# Altium PCB F407ULPI&externalDAC.PcbDoc
Units mm, origin at the board's own origin, x right, y up, seen from the top; angles counter-clockwise.
Board outline 152.4 x 101.6 mm, 4 copper layers (Top Layer, source, splane, Bottom Layer), stack 0.778 mm thick; 53 components, 99 nets, 320 pads, 89 vias.
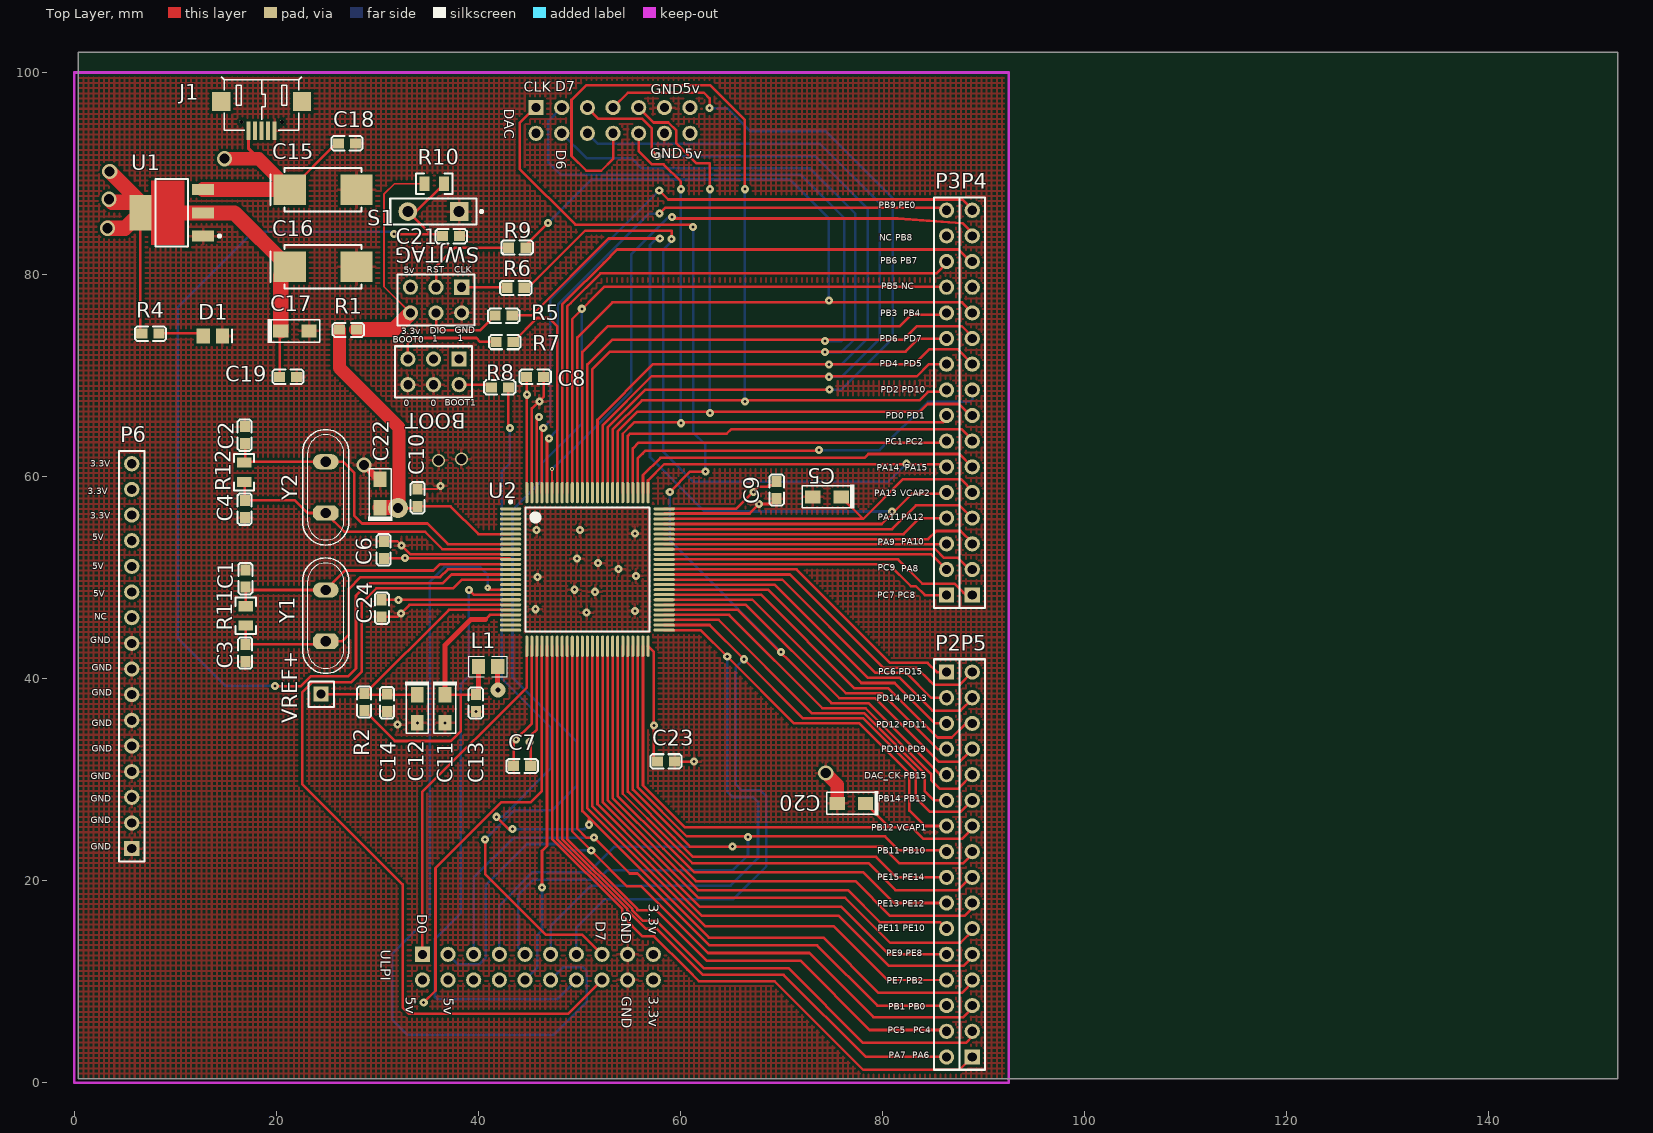
[diagram p0: Top Layer view]
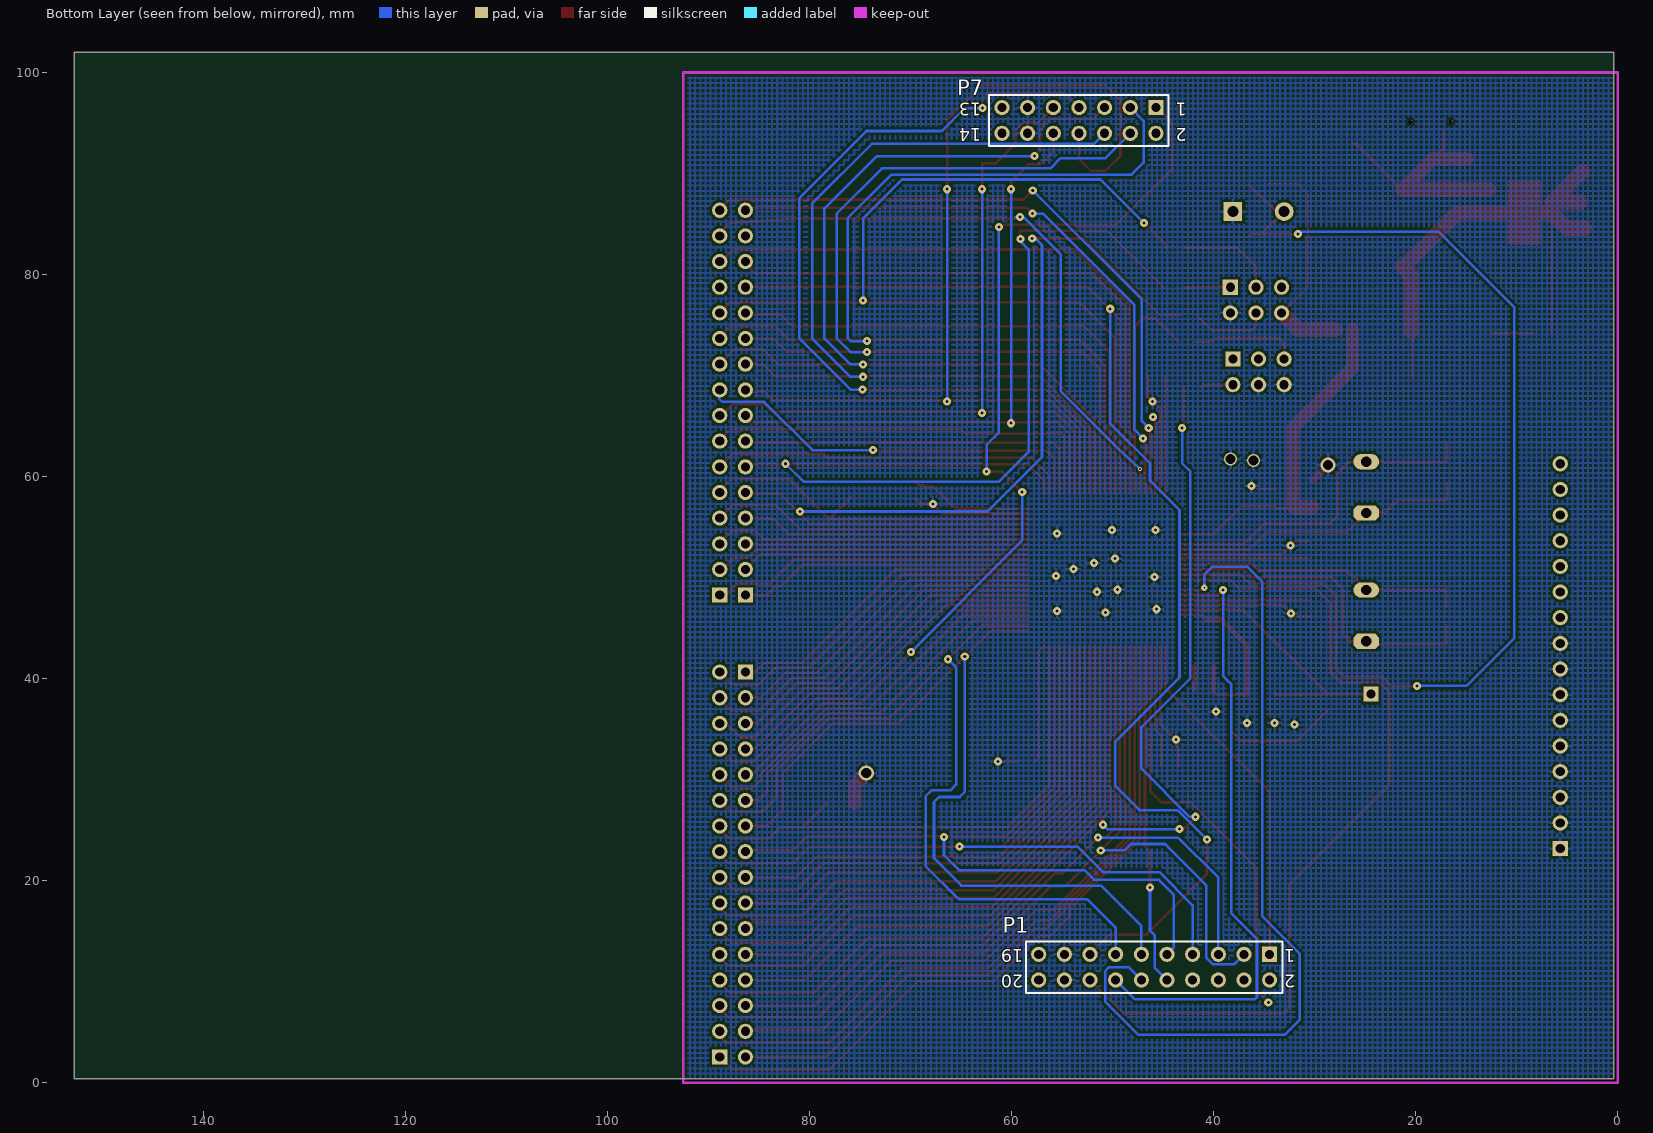
[diagram p1: Bottom Layer view, seen from below]
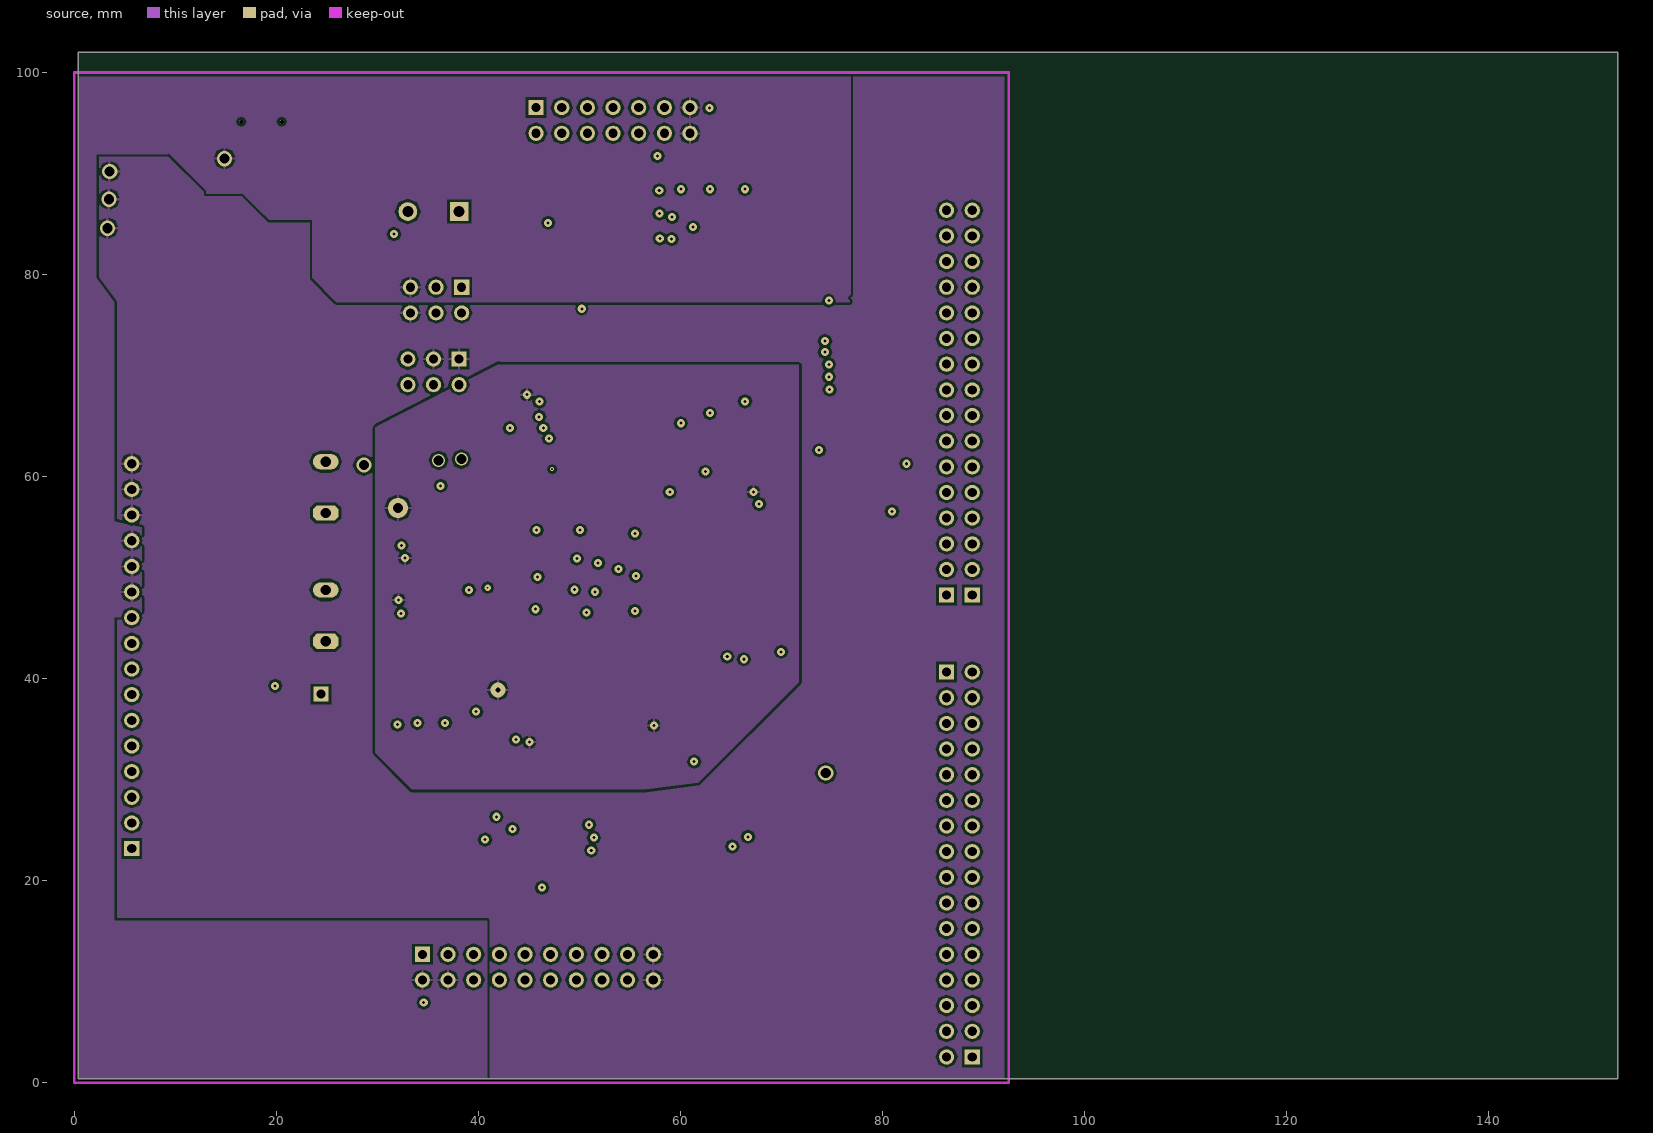
[diagram p2: source]
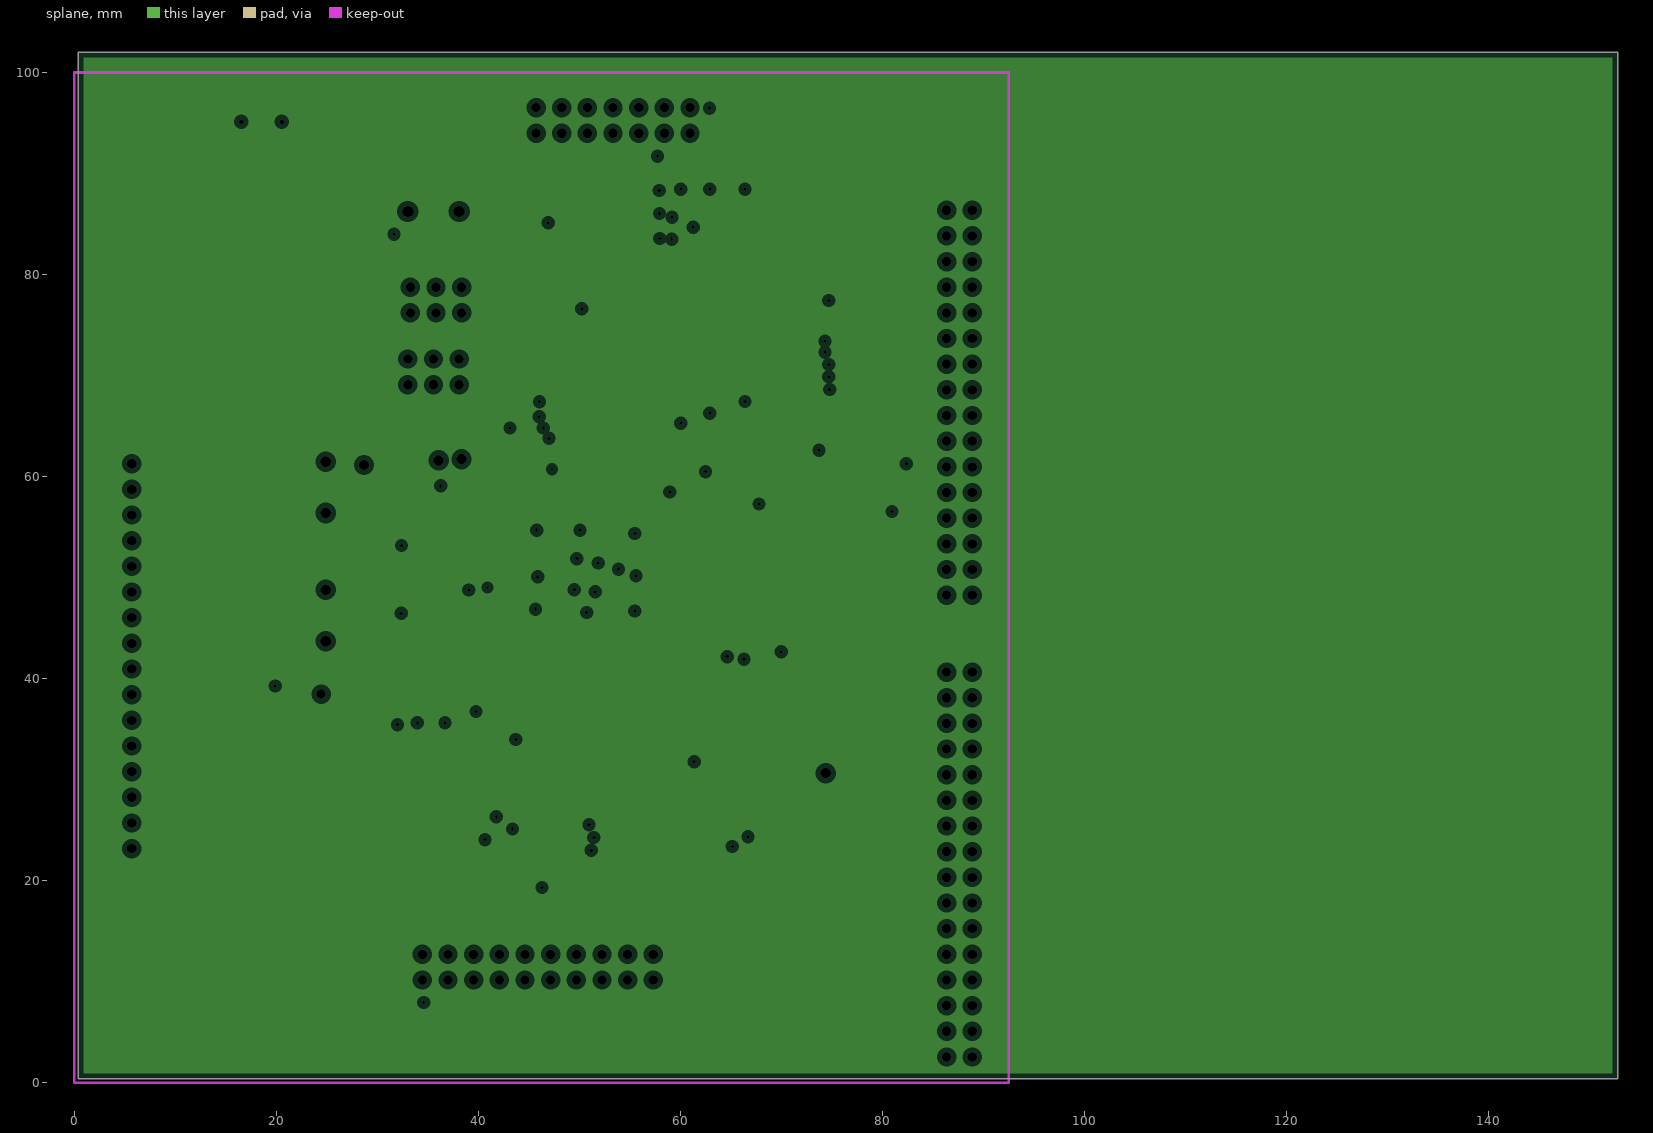
[diagram p3: splane, clearances drawn from the general rule]

## Layer stack, top to bottom
Top Solder: solder mask 0.0102, Solder Resist, Dk 3.5
Top Layer: signal copper 0.0356
Dielectric 1: core 0.254, FR-4, Dk 4.2
source: signal copper 0.036
Dielectric 3: prepreg 0.127, Dk 4.2
splane: plane copper 0.036
Dielectric 2: core 0.254, Dk 4.2
Bottom Layer: signal copper 0.0356
Bottom Solder: solder mask 0.0102, Solder Resist, Dk 3.5

## Board outline
0.4,0.4 152.8,0.4 152.8,102 0.4,102

## Design rules (kind name [scope] priority, off if disabled: settings)
Clearance polyClearance [InPolygon] p1: gap=0.254
ComponentClearance [All] p1 off: gap=0.254 collisioncheckmode=3 verticalgap=0.254 showdistances=FALSE
HoleSize [All] p1 off: absolutevalues=TRUE maxlimit=2.54 minlimit=0.025 maxpercent=80.000 minpercent=20.000
HoleToHoleClearance [All] p1 off: gap=0.254 allowstackedmicrovias=TRUE
MinimumSolderMaskSliver [All] p1 off: minsoldermaskwidth=0.254
PasteMaskExpansion [All] p1 off: expansion=0
PlaneClearance [All] p1: clearance=0.508
PlaneConnect [All] p1: planeconnectstyle=Relief reliefexpansion=0.508 reliefentries=4 reliefconductorwidth=0.254 reliefairgap=0.254
PolygonConnect [All] p1: connectstyle=Relief reliefconductorwidth=0.254 reliefentries=4 polygonreliefangle="90 Angle" airgapwidth=0.254
RoutingVias [All] p1: holewidth=0.3 width=0.8 viastyle="Through Hole" minholewidth=0.3 minwidth=0.8 maxholewidth=1 maxwidth=2
SilkToSilkClearance [All] p1 off: silktosilkclearance=0.254
SilkToSolderMaskClearance [IsPad] p1 off: minsilkscreentomaskgap=0.254 clearancetoexposedcopper=TRUE
SolderMaskExpansion [All] p1 off: expansion=0.102
Width [All] p1: maxlimit=2.54 minlimit=0.178 preferedwidth=0.254
21 further rules are at their usual default settings.

## Components (designator, comment, footprint, x,y, rotation, side; value= is the part's Value field where it differs from the comment)
BOOT "BOOT select" HDR2X3_CEN 38.1,71.628 r180 top (schematic designator "BOOT select")
C1 "cap smd" CAP-0603 16.967,49.047 r90 top
C2 "cap smd" CAP-0603 16.891,63.246 r90 top
C3 "cap smd" CAP-0603 16.942,41.681 r90 top
C4 "cap smd" CAP-0603 16.891,55.931 r90 top
C5 "Cap" CAP-3216 74.524,57.988 r180 top
C6 "cap smd" CAP-0603 30.658,51.892 r90 top
C7 "cap smd" CAP-0603 45.187,31.369 r180 top
C8 "cap smd" CAP-0603 44.78,69.85 r0 top
C9 "cap smd" CAP-0603 69.52,59.512 r270 top
C10 "cap smd" CAP-0603 33.96,58.75 r270 top
C11 "Cap Pol" CAP-3216 36.703,37.008 r270 top
C12 "Cap Pol" CAP-3216 33.96,37.008 r270 top
C13 "Cap" CAP-0603 39.776,36.728 r90 top
C14 "Cap" CAP-0603 30.988,36.754 r90 top
C15 "Cap" CAP-7343 24.638,88.392 r0 top
C16 "Cap" CAP-7343 24.638,80.772 r0 top
C17 "Cap" CAP-3216 21.844,74.422 r0 top
C18 "cap smd" CAP-0603 26.162,92.964 r0 top
C19 "cap smd" CAP-0603 20.32,69.85 r0 top
C20 "Cap" CAP-3216 76.937,27.635 r180 top
C21 "Cap" CAP-0603 38.151,83.82 r180 top
C22 "Cap" CAP-3216 30.277,58.318 r90 top
C23 "cap smd" CAP-0603 57.734,31.775 r0 top
C24 "cap smd" CAP-0603 30.429,47.803 r270 top
D1 "LED2" LED_0805 13.716,73.914 r0 top
J1 "USB" microUSB 18.542,94.234 r270 top
L1 "Inductor" 0805-1 40.97,41.199 r180 top
P1 "ULPI PHY" HDR2X10 34.46,12.7 r0 bottom
P2 "GPIO_PA" HDR1X16 86.36,40.64 r270 top
P3 "GPIO_PB" HDR1X16 86.36,48.26 r90 top
P4 "GPIO_PC" HDR1X16 88.9,48.26 r90 top
P5 "GPIO_PD" HDR1X16 88.9,2.54 r90 top
P6 "GPIO_PE" HDR1X16 5.69,23.165 r90 top
P7 "externalDAC" HDR2X7 45.72,96.52 r0 bottom
R1 "RES1" CAP-0603 27.965,74.549 r180 top
R2 "Res1" CAP-0603 28.727,36.83 r90 top
R4 "RES1" CAP-0603 8.382,74.168 r180 top
R5 "RES1" CAP-0603 43.358,75.946 r180 top
R6 "RES1" CAP-0603 44.552,78.689 r180 top
R7 "RES1" CAP-0603 43.459,73.33 r180 top
R8 "RES1" CAP-0603 41.275,68.809 r0 top
R9 "RES1" CAP-0603 43.002,82.652 r0 top
R10 "RES1" R2012[0805] 35.636,88.976 r180 top
R11 "RES1" R2012[0805] 16.967,46.203 r90 top
R12 "RES1" R2012[0805] 16.815,60.427 r90 top
S1 "SW-PB" SPST-2 35.56,86.233 r180 top
SWJTAG "SWJTAG" HDR2X3_CEN 38.354,78.74 r180 top
U1 "1117-3.3" SOT223 9.652,86.106 r90 top
U2 "STM32F407V" LQFP-100_M 50.8,50.8 r0 top
VREF+ "VREF+" HDR1*1 24.435,38.456 r180 top
Y1 "8MHz" Crystal 24.892,46.228 r90 top
Y2 "32.768kHz" Crystal 24.892,58.928 r90 top

## Footprints (in the part's own frame and the unit in brackets; to place one, negate y for a bottom-side part, rotate by r counter-clockwise, add the part's x,y. Pads: shape width x height; smd on the part's side, far side on the other; paste and mask are expansions set on the pad)
0805-1 [mm] "贴片带丝印"
  rect 1.3x1.5 smd: 1(-0.95,0) 2(0.95,0)
  silkscreen extent -1.91,-1.02 1.91,1.02, body extent -1.14,-0.51 1.14,0.51, height 1
CAP-0603 [mm]
  rect 1.1x1 smd: 1(0,0) 2(1.7,0)
  silkscreen extent -0.71,-0.67 2.39,0.73
CAP-3216 [mil] "钽电容"
  rect 60x50 smd: 1(-55,0) 2(55,0)
  silkscreen extent -106,-48 96,46
CAP-7343 [mm] "钽电容"
  rect 3.2x3.05 smd: 1(-3.302,0) 2(3.302,0)
  silkscreen extent -5.21,-2.16 3.81,2.16, body extent -3.68,-1.91 3.68,1.91, height 2.95
Crystal [mil]
  oct 60x100 hole 40: 1(-100,0)
  oval 60x100 hole 40: 2(100,0)
  silkscreen extent -225,-90 225,90, body extent -224,-91 224,89, height 134
HDR1*1 [mm]
  rect 1.5x1.5 hole 0.9: 1(0,0)
  silkscreen extent -1.27,-1.27 1.27,1.27
HDR1X16 [mm] "Connector; Header; 16 Position"
  rect 1.5x1.5 hole 0.9: 1(0,0)
  round 1.5 hole 0.9: 2(2.54,0) 3(5.08,0) 4(7.62,0) 5(10.16,0) 6(12.7,0) 7(15.24,0) 8(17.78,0) 9(20.32,0) 10(22.86,0) 11(25.4,0) 12(27.94,0) 13(30.48,0) 14(33.02,0) 15(35.56,0) 16(38.1,0)
  silkscreen extent -1.27,-1.27 39.37,1.27
HDR2X3_CEN [mm] "Connector; Header; 3x2 Position"
  rect 1.5x1.5 hole 0.9: 1(0,0)
  round 1.5 hole 0.9: 2(2.54,0) 3(5.08,0) 4(0,2.54) 5(2.54,2.54) 6(5.08,2.54)
  silkscreen extent -1.27,-1.27 6.35,3.81
HDR2X7 [mm] "Connector; Header; 7x2 Position"
  rect 1.5x1.5 hole 0.9: 1(0,0)
  round 1.5 hole 0.9: 2(0,2.54) 3(2.54,0) 4(2.54,2.54) 5(5.08,0) 6(5.08,2.54) 7(7.62,0) 8(7.62,2.54) 9(10.16,0) 10(10.16,2.54) 11(12.7,0) 12(12.7,2.54) 13(15.24,0) 14(15.24,2.54)
  silkscreen extent -1.27,-1.27 16.51,3.81
HDR2X10 [mm] "Connector; Header; 10x2 Position"
  rect 1.5x1.5 hole 0.9: 1(0,0)
  round 1.5 hole 0.9: 2(0,2.54) 3(2.54,0) 4(2.54,2.54) 5(5.08,0) 6(5.08,2.54) 7(7.62,0) 8(7.62,2.54) 9(10.16,0) 10(10.16,2.54) 11(12.7,0) 12(12.7,2.54) 13(15.24,0) 14(15.24,2.54) 15(17.78,0) 16(17.78,2.54) 17(20.32,0) 18(20.32,2.54) 19(22.86,0) 20(22.86,2.54)
  silkscreen extent -1.27,-1.27 24.13,3.81
LED_0805 [mm] "贴片二极管"
  rect 1.3x1.5 smd: 1(-0.95,0) 2(0.95,0)
  silkscreen extent 1.91,-0.64 1.91,0.64
LQFP-100_M [mm] "Thin QFP, 100"
  oval 2.1x0.3 smd: 1(-7.6,6) 2(-7.6,5.5) 3(-7.6,5) 4(-7.6,4.5) 5(-7.6,4) 6(-7.6,3.5) 7(-7.6,3) 8(-7.6,2.5) 9(-7.6,2) 10(-7.6,1.5) 11(-7.6,1) 12(-7.6,0.5) 13(-7.6,0) 14(-7.6,-0.5) 15(-7.6,-1) 16(-7.6,-1.5) 17(-7.6,-2) 18(-7.6,-2.5) 19(-7.6,-3) 20(-7.6,-3.5) 21(-7.6,-4) 22(-7.6,-4.5) 23(-7.6,-5) 24(-7.6,-5.5) 25(-7.6,-6) 51(7.6,-6) 52(7.6,-5.5) 53(7.6,-5) 54(7.6,-4.5) 55(7.6,-4) 56(7.6,-3.5) 57(7.6,-3) 58(7.6,-2.5) 59(7.6,-2) 60(7.6,-1.5) 61(7.6,-1) 62(7.6,-0.5) 63(7.6,0) 64(7.6,0.5) 65(7.6,1) 66(7.6,1.5) 67(7.6,2) 68(7.6,2.5) 69(7.6,3) 70(7.6,3.5) 71(7.6,4) 72(7.6,4.5) 73(7.6,5) 74(7.6,5.5) 75(7.6,6)
  oval 0.3x2.1 smd: 26(-6,-7.6) 27(-5.5,-7.6) 28(-5,-7.6) 29(-4.5,-7.6) 30(-4,-7.6) 31(-3.5,-7.6) 32(-3,-7.6) 33(-2.5,-7.6) 34(-2,-7.6) 35(-1.5,-7.6) 36(-1,-7.6) 37(-0.5,-7.6) 38(0,-7.6) 39(0.5,-7.6) 40(1,-7.6) 41(1.5,-7.6) 42(2,-7.6) 43(2.5,-7.6) 44(3,-7.6) 45(3.5,-7.6) 46(4,-7.6) 47(4.5,-7.6) 48(5,-7.6) 49(5.5,-7.6) 50(6,-7.6) 76(6,7.6) 77(5.5,7.6) 78(5,7.6) 79(4.5,7.6) 80(4,7.6) 81(3.5,7.6) 82(3,7.6) 83(2.5,7.6) 84(2,7.6) 85(1.5,7.6) 86(1,7.6) 87(0.5,7.6) 88(0,7.6) 89(-0.5,7.6) 90(-1,7.6) 91(-1.5,7.6) 92(-2,7.6) 93(-2.5,7.6) 94(-3,7.6) 95(-3.5,7.6) 96(-4,7.6) 97(-4.5,7.6) 98(-5,7.6) 99(-5.5,7.6) 100(-6,7.6)
  silkscreen extent -7.72,-6.15 6.15,6.82, body extent -7,-7 7,7, height 0.8
microUSB [mm]
  rect 1.9x1.8 smd: 0(-2.9,4) 0(-2.9,-4)
  rect 1.8x0.4 smd: 1(0,-1.3) 2(0,-0.65) 3(0,0) 4(0,0.65) 5(0,1.3)
  round 0.4 hole 0.4 unplated mask+0: ""(-0.875,2) ""(-0.875,-2)
  silkscreen extent -5.35,-4 -0.05,4, body extent -5.5,-4 0,4, height 2.5
R2012[0805] [mm]
  rect 1x1.45 smd: 1(-0.95,0) 2(0.95,0)
  silkscreen extent -1.8,-1 1.8,1, body extent -1,-0.63 1,0.63, height 0.55
SOT223 [mm] "SOT-223/SC-73; 4 Leads; Body 6.7 x 7.3 mm, inc. leads (LxW max)"
  rect 1.1x2.15 smd: 1(-2.3,-3.1) 2(0,-3.1) 3(2.3,-3.1)
  rect 3.5x2.15 smd: 4(0,3.1)
  silkscreen extent -3.35,-4.85 3.35,1.63
SPST-2 [mm] "Switch; 2 Leads"
  rect 1.85x1.85 hole 1.1: 1(-2.54,0)
  round 1.85 hole 1.1: 2(2.54,0)
  silkscreen extent -4.89,-1.27 4.28,1.27

## Part data
BOOT SWJTAG: library part "Header 3X2", "Header, 3-Pin, Dual row"
C1 C2 C3 C4 C6 C7 C8 C9 C10 C18 C19 C23 C24: library part CAP, "贴片无极性电容"
C5 C15 C16 C17 C20 C22: library part "Cap Pol S", "贴片极性电容"
C11 C12: "极性电解电容"
C13 C14 C21: "无极性电容"
D1: "Typical RED, GREEN, YELLOW, AMBER GaAs LED"
J1: library part Micro_USB, "USB 2.0, Right Angle, SMT, B Type, Receptacle, 5 Position, Black"
L1: "电感"
P1: library part MHDR2X10, "Header, 10-Pin, Dual row"
P2 P3 P4 P5 P6: library part "Header 16", "Header, 16-Pin"
P7: library part "Header 7X2", "Header, 7-Pin, Dual row"
R2: "贴片电阻"
S1: "Switch"
U2: "STM32单片机100引脚"
VREF+: library part "Header 1"
Y1 Y2: library part CRYSTAL, "Crystal"

## Via types
v1: diameter 0.8, hole 0.3, Top Layer to Bottom Layer, 70 vias
v2: diameter 0.8, hole 0.3, Top Layer to source, 6 vias
v3: diameter 1.5, hole 1, Top Layer to source, 4 vias
v4: diameter 1.5, hole 1, Top Layer to Bottom Layer, 2 vias
v5: diameter 1.3, hole 1, Top Layer to Bottom Layer, 2 vias
v6: diameter 0.8/0.8/0.8 (per signal layer), hole 0.3, Top Layer to Bottom Layer, 1 vias
v7: diameter 0.635, hole 0.178, Top Layer to Bottom Layer, 1 vias
v8: diameter 2, hole 1, Top Layer to source, 1 vias
v9: diameter 1.5, hole 0.5, Top Layer to source, 1 vias
v10: diameter 0.406, hole 0.203, Top Layer to Bottom Layer, 1 vias

## Nets (pads, with @x,y where several pads share a name; then routed paths per layer and width w, separated by ;. In a path a pad name is that pad's centre, name@x,y a point inside that pad or via, vN(x,y) a via of type N, cw(c..) or ccw(c..) an arc to the next point about the centre after c; other vN are vias at no path point)
3.3V: BOOT.1 BOOT.2 C16.1 C17.1 C19.1 P1.19 P1.20 P6.14 P6.15 P6.16 R1.1 R4.2 R10.2 SWJTAG.6 U1.2 U1.4 | length 74.4
  Top Layer w0.178: SWJTAG.6 30.658,78.816 30.658,87.935 31.699,88.976 R10.2
  Top Layer w0.254: R4.2@6.552,74.298 U1.4 ; C19.1 20.32,74.295 C17.1
  Top Layer w1.5: v3(3.277,84.582) 5.028,84.582 U1.4 U1.2 15.85,86.106 21.184,80.772 C16.1 20.447,79.883 C17.1 ; v3(3.505,90.195) 6.552,87.149 v3@3.733,87.149 ; R1.1 31.623,74.549 SWJTAG.6
  other v3: 3.429,87.452
+5V: C15.1 C18.1 J1.1 P1.2 P1.4 P6.11 P6.12 P6.13 P7.13 P7.14 SWJTAG.3 U1.3 | length 26.2
  Top Layer w0.254: C15.1 25.908,92.964 C18.1
  Top Layer w0.33: J1.1 17.242,92.486 18.263,91.465 ; C15.1@21.322,88.406 C15.1
  Top Layer w1.3: v3(14.884,91.465) 18.263,91.465 C15.1@21.322,88.406
  Top Layer w1.5: U1.3 C15.1@21.322,88.406
BOOT0: BOOT.3 R7.2 | length 10.7
  Top Layer w0.254: BOOT.3 33.02,73.203 33.528,73.711 39.804,73.711 40.185,73.33 R7.2
BOOT1: BOOT.4 R8.1 | length 3.3
  Top Layer w0.254: BOOT.4 40.996,69.088 R8.1
DAC_CLOCK: P2.5 P7.1 U2.55 | length 110.5
  Top Layer w0.254: P7.1 45.618,96.52 44.094,94.996 44.094,90.449 49.606,84.938 61.011,84.938 v1(61.265,84.684) ; U2.55 65.722,46.8 74.962,37.56 78.613,37.56 85.693,30.48 P2.5 ; v1(58.953,58.471) 60.96,60.477 v1(62.484,60.477)
  Bottom Layer w0.254: v1(58.953,58.471) 58.953,53.67 v1(69.977,42.647) ; v1(61.265,84.684) 61.265,64.364 62.484,63.144 v1(62.484,60.477)
DAC_D0: P3.8 P7.10 U2.81 | length 69.8
  Top Layer w0.254: U2.81 54.3,64.236 55.418,65.354 86.004,65.354 86.436,65.786 P3.8@86.36,65.786 ; P7.10 55.88,92.227 57.201,90.907 58.344,90.907 60.046,89.205 v1(60.046,88.443)
  Bottom Layer w0.254: v1(60.046,65.278) v1(60.046,88.443)
DAC_D1: P4.8 P7.9 U2.82 | length 77.5
  Top Layer w0.254: U2.82 53.8,64.443 55.778,66.421 83.718,66.421 84.48,67.183 87.605,67.183 P4.8@88.824,65.964 ; P7.9 57.353,95.047 58.801,95.047 59.614,94.234 59.614,92.989 61.595,91.008 62.916,91.008 v1(62.916,88.443)
  Bottom Layer w0.254: v1(62.916,66.269) v1(62.916,88.443)
DAC_D2: P3.9 P7.8 U2.83 | length 101.3
  Top Layer w0.254: U2.83 53.3,64.651 56.188,67.539 83.668,67.539 84.506,68.377 P3.9@86.436,68.377 ; P7.8 53.34,91.44 52.172,90.272 50.698,90.272 49.225,91.745 49.225,97.282 50.698,98.755 62.941,98.755 66.396,95.301 v1(66.396,88.443)
  Bottom Layer w0.254: v6(66.396,67.437) v1(66.396,88.443)
DAC_D3: P7.7 U2.84 | length 85.4
  Top Layer w0.254: U2.84 52.8,64.858 56.522,68.58 v1@74.778,68.58 ; P7.7 54.813,97.993 62.332,97.993 62.89,97.434 v1(62.89,96.469)
  Bottom Layer w0.254: v1(62.89,96.469) 64.643,96.469 66.904,94.209 74.378,94.209 81.026,87.561 81.026,73.685 75.946,68.605 v1(74.778,68.605)
DAC_D4: P3.10 P7.6 U2.85 | length 95
  Top Layer w0.254: U2.85 52.3,65.065 57.161,69.926 83.414,69.926 84.582,71.095 P3.10@86.36,71.095
  Bottom Layer w0.254: P7.6 51.841,92.939 73.852,92.939 79.756,87.035 79.756,73.685 75.946,69.875 v1(74.701,69.875)
DAC_D5: P4.10 P7.5 U2.86 | length 98.9
  Top Layer w0.254: P7.5 51.918,95.402 56.236,95.402 57.175,94.463 57.175,92.278 v1(57.734,91.719) ; U2.86 51.8,65.618 57.302,71.12 83.185,71.12 84.684,72.619 87.42,72.619 P4.10@89.024,71.015
  Bottom Layer w0.254: v1(57.734,91.719) 73.347,91.719 78.537,86.53 78.537,73.685 75.946,71.095 v1(74.701,71.095)
DAC_D6: P3.11 P7.4 U2.87 | length 96.8
  Top Layer w0.254: U2.87 51.3,70.629 53.035,72.365 82.296,72.365 83.591,73.66 P3.11
  Bottom Layer w0.254: P7.4 50.724,91.516 55.143,91.516 56.159,90.5 72.842,90.5 77.318,86.025 77.318,73.685 75.946,72.314 v1(74.32,72.314)
DAC_D7: P4.11 P7.3 U2.88 | length 104.4
  Top Layer w0.254: U2.88 50.8,71.095 53.264,73.558 82.093,73.558 83.414,74.879 87.859,74.879 P4.11@88.989,73.749
  Bottom Layer w0.254: P7.3 46.939,95.199 46.939,91.084 48.133,89.891 71.907,89.891 76.225,85.573 76.225,73.685 75.946,73.406 v1(74.32,73.406)
GND: BOOT.5 BOOT.6 C1.2 C2.2 C3.1 C4.1 C5.2 C6.2 C7.2 C8.2 C9.2 C10.1 C11.2 C12.2 C13.1 C14.1 C15.2 C16.2 C17.2 C18.2 C19.2 C20.2 C21.1 C22.2 C23.2 C24.2 D1.2 J1.5 P1.17 P1.18 P6.1 P6.2 P6.3 P6.4 P6.5 P6.6 P6.7 P6.8 P6.9 P7.11 P7.12 S1.1 SWJTAG.4 U1.1 U2.10 U2.20 U2.27 U2.74 U2.99 | length 72.7
  Top Layer w0.203: C10.1 35.941,58.75 v1(36.271,59.08)
  Top Layer w0.254: C24.2 31.98,46.103 33.178,47.3 U2.20 ; C6.2 31.98,53.592 33.273,52.3 U2.10 ; C7.2 43.487,33.758 45.3,35.572 U2.27 ; U2.99 45.3,66.738 46.48,67.918 C8.2 ; U2.74 58.439,56.339 66.855,56.339 v1(67.793,57.277) 68.985,57.277 C9.2 ; C23.2 v1(61.366,31.775)
  Top Layer w0.7: v4(28.677,61.138) 30.099,59.715 C22.2
  Top Layer w1.3: v4(74.397,30.632) 75.54,29.489 C20.2
  other v1: 43.713,33.96 32.004,35.433 33.96,35.611 36.703,35.611 39.776,36.728 32.36,46.457 50.724,46.533 55.499,46.685 45.669,46.863 51.562,48.59 49.505,48.793 45.872,50.063 55.601,50.165 53.873,50.825 51.867,51.435 49.759,51.867 32.385,53.162 55.499,54.356 45.771,54.686 50.063,54.686 46.05,67.412
  other v5: 36.068,61.595 38.329,61.722
GPIO_PA0: U2.23
GPIO_PA1: U2.24
GPIO_PA2: U2.25
GPIO_PA3: P1.1 U2.26 | length 34.8
  Top Layer w0.254: P1.1 34.46,28.796 44.8,39.136 U2.26
GPIO_PA4: U2.29 | length 41.8
  Top Layer w0.254: v1(34.595,7.925) 35.763,9.093 35.763,21.234 42.266,27.737 45.187,27.737 46.3,28.85 46.3,35.052 46.3,42.023 U2.29
GPIO_PA5: P1.10 U2.30 | length 34
  Top Layer w0.254: v1(46.304,19.304) 46.304,22.936 46.8,23.432 U2.30
  Bottom Layer w0.254: P1.10 45.847,11.387 45.847,14.605 46.355,15.113 46.304,15.164 v1(46.304,19.304)
GPIO_PA6: P5.1 U2.31 | length 71.1
  Top Layer w0.254: U2.31 47.3,42.023 47.3,35.052 47.3,24.13 54.253,17.177 54.253,17.05 54.253,16.486 56.261,14.478 57.404,14.478 60.706,11.176 61.849,10.033 63.405,10.033 64.23,10.033 65.405,10.033 69.342,10.033 78.105,1.27 87.63,1.27 P5.1
GPIO_PA7: P2.16 U2.32 | length 66.6
  Top Layer w0.254: U2.32 47.8,42.023 47.8,35.052 47.8,24.13 54.753,17.177 54.753,17.05 56.563,15.24 57.658,15.24 62.23,10.668 65.405,10.668 70.231,10.668 78.359,2.54 P2.16
GPIO_PA8: P4.2 U2.67 | length 31.6
  Top Layer w0.254: U2.67 59.577,52.8 66.929,52.8 68.453,52.8 78.633,52.8 85.249,52.8 86.106,51.943 87.503,51.943 88.589,50.858 P4.2@88.589,50.234
GPIO_PA9: P3.3 U2.68 | length 28.2
  Top Layer w0.254: U2.68 59.577,53.3 66.929,53.3 68.453,53.3 78.426,53.3 ; 78.232,53.3 86.32,53.3 P3.3
GPIO_PA10: P4.3 U2.69 | length 31.4
  Top Layer w0.254: U2.69 59.577,53.8 66.929,53.8 68.453,53.8 78.218,53.8 84.534,53.8 85.344,54.61 87.757,54.61 P4.3@88.964,53.404
GPIO_PA11: P3.4 U2.70 | length 28.6
  Top Layer w0.254: U2.70 59.577,54.3 66.929,54.3 68.453,54.3 78.011,54.3 82.113,54.3 83.693,55.88 P3.4
GPIO_PA12: P4.4 U2.71 | length 32
  Top Layer w0.254: U2.71 59.577,54.8 66.929,54.8 68.453,54.8 77.804,54.8 80.962,54.8 83.312,57.15 87.63,57.15 P4.4
GPIO_PA13: P3.5 R5.1 U2.72 | length 95.4
  Top Layer w0.254: R5.1 45.288,75.946 52.908,83.566 v1(57.963,83.566) ; U2.72 79.938,55.3 82.931,58.293 P3.5@86.36,58.293
  Bottom Layer w0.254: v1(57.963,83.566) 57.658,83.566 56.998,82.906 56.998,61.925 62.382,56.54 v1(80.95,56.54)
GPIO_PA14: P3.6 R6.1 U2.76 | length 96.3
  Top Layer w0.254: R6.1@44.933,78.689 50.584,84.341 59.144,84.341 v1(59.144,83.503) ; U2.76 56.8,59.619 58.407,61.227 P3.6@86.36,61.227
  Bottom Layer w0.254: v1(59.144,83.503) 59.144,83.274 58.293,82.423 58.293,62.484 61.316,59.461 80.569,59.461 v1(82.372,61.265)
GPIO_PA15: P4.6 U2.77 | length 35.7
  Top Layer w0.254: U2.77 56.3,60.135 58.014,61.849 78.232,61.849 78.613,62.23 87.63,62.23 P4.6
GPIO_PB0: P1.3 P5.3 U2.35 | length 90.3
  Top Layer w0.254: U2.35 49.3,24.868 v1(51.181,22.987) 54.737,19.431 56.134,19.431 62.738,12.827 72.771,12.827 79.121,6.477 88.011,6.477 P5.3@89.154,7.62
  Bottom Layer w0.254: P1.3 37.991,11.709 40.081,11.709 40.716,12.344 40.716,19.533 44.806,23.622 48.184,23.622 48.819,22.987 v1(51.181,22.987)
GPIO_PB1: P1.5 P2.14 U2.36 | length 83
  Top Layer w0.254: U2.36 49.8,25.13 50.673,24.257 v1(51.435,24.257) 54.991,20.701 55.753,20.701 62.865,13.589 73.533,13.589 79.502,7.62 P2.14
  Bottom Layer w0.254: P1.5 39.54,20.287 43.51,24.257 v1(51.435,24.257)
GPIO_PB2: P5.4 R8.2 U2.37 | length 120.9
  Top Layer w0.254: v1(41.783,26.314) 43.002,25.095 v1(43.383,25.095) ; R8.2 42.975,64.95 v1(43.129,64.795) ; U2.37 50.3,26.865 62.814,14.351 74.168,14.351 79.629,8.89 87.884,8.89 P5.4@89.027,10.033 ; v1(50.952,25.527) 50.952,26.06
  Bottom Layer w0.254: v1(41.783,26.314) 42.393,26.314 47.168,31.09 47.168,35.179 42.316,40.03 42.316,60.503 43.129,61.316 v1(43.129,64.795) ; v1(43.383,25.095) 50.521,25.095 v1(50.952,25.527)
GPIO_PB3: P3.12 U2.89 | length 51.8
  Top Layer w0.254: U2.89 50.3,62.281 ; 50.3,61.976 50.3,71.044 50.3,72.347 52.832,74.879 81.737,74.879 82.88,76.022 P3.12@86.36,76.022
GPIO_PB4: P4.12 R9.2 U2.90 | length 99
  Top Layer w0.254: R9.2 44.702,82.904 v1(46.914,85.115) ; U2.90 49.8,73.778 53.264,77.241 87.884,77.241 P4.12@88.9,76.225
  Bottom Layer w0.254: v1(46.914,85.115) 51.206,89.408 70.841,89.408 74.701,85.547 v1(74.701,77.419)
GPIO_PB5: P1.15 P3.13 U2.91 | length 137.8
  Top Layer w0.254: v1(40.665,24.054) 40.665,20.65 46.685,14.63 50.31,14.63 P1.15 ; U2.91 49.3,75.589 52.502,78.791 P3.13@86.36,78.791
  Bottom Layer w0.254: v1(40.665,24.054) 43.586,26.975 47.346,26.975 49.733,29.362 49.733,33.757 43.383,40.107 43.383,56.667 46.304,59.588 46.304,61.316 50.241,65.253 v1(50.241,76.606)
GPIO_PB6: P3.14 U2.92 | length 58
  Top Layer w0.254: U2.92 48.8,59.577 48.8,62.179 48.8,76.816 49.149,77.165 52.095,80.112 85.344,80.112 P3.14@86.512,81.28
GPIO_PB7: P4.14 U2.93 | length 61.9
  Top Layer w0.254: U2.93 48.3,59.577 48.3,62.179 48.3,77.023 48.795,77.519 52.426,81.149 53.75,82.474 87.554,82.474 P4.14@88.824,81.204
GPIO_PB8: P4.15 U2.95 | length 63.2
  Top Layer w0.178: 47.3,59.577 v10@47.3,60.833
  Top Layer w0.254: U2.95 47.3,59.577 ; v1@59.334,85.547 81.509,85.547 87.935,85.09 88.036,84.988 P4.15@89.052,83.972
  Bottom Layer w0.254: v10(47.3,60.731) 49.581,62.885 55.132,68.436 55.132,81.98 58.826,85.674 59.665,85.674
  other v1: 59.182,85.674
GPIO_PB9: P3.16 U2.96 | length 61.6
  Top Layer w0.254: U2.96 46.8,59.577 46.8,62.179 46.8,63.589 v1(46.99,63.779) ; v1(57.937,86.03) 58.496,86.589 86.106,86.589 P3.16@86.347,86.347
  Bottom Layer w0.254: v1(46.99,63.779) 47.854,64.643 47.854,76.987 56.896,86.03 v1(57.937,86.03)
GPIO_PB10: P1.7 P5.9 U2.47 | length 81.7
  Top Layer w0.254: U2.47 55.3,29.011 60.943,23.368 v1(65.151,23.368) 80.01,23.368 81.661,21.717 88.011,21.717 P5.9@89.027,22.733
  Bottom Layer w0.254: P1.7 42.08,17.544 45.364,20.828 50.952,20.828 53.492,23.368 v1(65.151,23.368)
GPIO_PB11: P1.9 P2.8 U2.48 | length 79.6
  Top Layer w0.254: U2.48 55.8,29.218 60.634,24.384 80.264,24.384 81.661,22.987 P2.8@86.487,22.987
  Bottom Layer w0.254: P1.9 43.942,13.378 43.942,18.567 45.466,20.091 51.867,20.091 52.807,21.031 65.227,21.031 66.7,22.504 v1(66.7,24.333)
GPIO_PB12: P1.11 P2.7 U2.51 | length 86.7
  Top Layer w0.254: U2.51 62.007,44.8 v1(64.643,42.164) 71.247,35.56 77.724,35.56 82.677,30.607 82.677,26.924 84.201,25.4 P2.7
  Bottom Layer w0.254: P1.11 47.16,15.512 51.156,19.507 64.973,19.507 67.691,22.225 67.691,27.762 67.183,28.27 65.151,28.27 64.643,28.778 v1(64.643,42.164)
GPIO_PB13: P1.13 P5.11 U2.52 | length 87.3
  Top Layer w0.254: U2.52 62.904,45.3 v1(66.294,41.91) 72.144,36.06 78.113,36.06 83.312,30.861 83.312,28.194 84.709,26.797 87.757,26.797 P5.11
  Bottom Layer w0.254: P1.13 49.7,15.334 52.527,18.161 65.253,18.161 68.504,21.412 68.504,28.372 67.945,28.931 66.065,28.931 65.507,29.489 65.507,41.123 v1(66.294,41.91)
GPIO_PB14: P2.6 U2.53 | length 36.4
  Top Layer w0.254: U2.53 59.577,45.8 63.801,45.8 73.041,36.56 78.216,36.56 84.074,30.702 84.201,30.575 84.201,28.829 85.09,27.94 P2.6
GPIO_PB15: P5.12 U2.54 | length 38.6
  Top Layer w0.254: U2.54 59.577,46.3 64.825,46.3 74.065,37.06 77.597,37.06 78.335,37.06 84.836,30.559 84.836,29.972 85.725,29.083 87.503,29.083 P5.12
GPIO_PC0: P1.16 U2.15 | length 86
  Top Layer w0.254: U2.15 38.37,49.8 37.49,48.92 29.896,48.92 28.473,47.498 28.473,40.691 27.407,39.624 23.546,39.624 22.555,38.633 22.555,29.566 32.512,19.609 32.512,7.442 33.147,6.807 48.887,6.807 P1.16
GPIO_PC1: U2.16
GPIO_PC2: P1.12 U2.17 | length 83.8
  Top Layer w0.254: v7(40.919,48.997) 41.116,48.8 U2.17
  Bottom Layer w0.254: v7(40.919,48.997) 40.919,50.317 40.183,51.054 36.652,51.054 35.179,49.581 35.179,16.459 31.471,12.751 31.471,6.223 32.969,4.724 47.447,4.724 50.749,8.026 50.749,11.024 50.343,11.43 48.43,11.43 P1.12
GPIO_PC3: P1.14 U2.18 | length 60.9
  Top Layer w0.254: v1(39.065,48.768) 39.533,48.3 U2.18
  Bottom Layer w0.254: v1(39.065,48.768) 39.065,40.259 38.278,39.472 38.278,16.789 35.712,14.224 35.712,8.458 35.941,8.23 47.77,8.23 P1.14
GPIO_PC4: P5.2 U2.33 | length 68.9
  Top Layer w0.254: U2.33 48.3,42.023 48.3,35.052 48.3,24.13 55.253,17.177 55.253,17.05 56.301,16.002 57.658,16.002 62.357,11.303 65.278,11.303 70.739,11.303 78.105,3.937 88.265,3.937 88.9,4.572 P5.2
GPIO_PC5: P2.15 U2.34 | length 64.5
  Top Layer w0.254: U2.34 48.8,42.023 48.8,35.052 48.8,24.13 55.753,17.177 55.753,17.05 57.626,17.05 62.611,12.065 65.151,12.065 71.882,12.065 78.74,5.207 P2.15@86.36,5.207
GPIO_PC6: P2.1 U2.63 | length 32.2
  Top Layer w0.254: U2.63 59.577,50.8 71.501,50.8 80.741,41.56 81.686,41.56 83.459,41.56 84.475,41.56 85.395,40.64 P2.1
GPIO_PC7: P3.1 U2.64 | length 29.2
  Top Layer w0.254: U2.64 59.577,51.3 66.929,51.3 68.453,51.3 79.254,51.3 80.653,51.3 82.816,49.137 83.324,49.137 84.201,48.26 P3.1
GPIO_PC8: P4.1 U2.65 | length 32
  Top Layer w0.254: U2.65 59.577,51.8 66.929,51.8 68.453,51.8 79.047,51.8 81.55,51.8 83.947,49.403 87.122,49.403 88.023,48.502 88.265,48.26 P4.1
GPIO_PC9: P3.2 U2.66 | length 28.6
  Top Layer w0.254: U2.66 59.577,52.3 66.929,52.3 68.453,52.3 78.84,52.3 84.86,52.3 P3.2
GPIO_PC10: P4.9 U2.78 | length 39.9
  Top Layer w0.254: U2.78 55.8,61.82 56.261,62.281 56.515,62.535 73.66,62.535 v1(73.736,62.611)
  Bottom Layer w0.254: v1(73.736,62.611) 79.731,62.611 84.506,67.386 88.646,67.386 88.946,67.687 P4.9@88.946,68.58
GPIO_PC11: P3.7 U2.79 | length 39.7
  Top Layer w0.254: 55.3,62.179 55.3,59.577 ; P3.7@86.589,63.398 86.131,63.398 86.081,63.348 55.859,63.348 55.3,62.789 55.3,59.577 ; 55.3,59.577 U2.79 55.3,59.577
GPIO_PC12: P4.7 U2.80 | length 44.4
  Top Layer w0.254: 54.8,62.179 54.8,59.577 ; 87.469,64.677 87.392,64.677 ; P4.7@88.976,63.576 87.875,64.677 87.392,64.677 ; 54.8,59.577 U2.80 54.8,59.577 ; 54.8,59.577 54.8,64.029 55.007,64.237 64.592,64.237 65.033,64.677 87.392,64.677
GPIO_PC13: U2.7
GPIO_PD9: P5.13 U2.56 | length 37.5
  Top Layer w0.254: U2.56 59.577,47.3 66.492,47.3 75.732,38.06 78.486,38.06 79.288,38.06 85.598,31.75 87.63,31.75 88.03,32.15 ; 88.01,32.13 P5.13
GPIO_PD10: P2.4 U2.57 | length 34.1
  Top Layer w0.254: U2.57 59.577,47.8 67.135,47.8 76.375,38.56 78.486,38.56 79.931,38.56 84.709,33.782 85.471,33.02 P2.4
GPIO_PD11: P5.14 U2.58 | length 36.9
  Top Layer w0.254: U2.58 59.577,48.3 67.97,48.3 77.21,39.06 78.994,39.06 80.574,39.06 85.471,34.163 86.626,34.163 86.868,34.163 88.265,35.56 P5.14
GPIO_PD12: P2.3 U2.59 | length 35.7
  Top Layer w0.254: U2.59 59.577,48.8 68.675,48.8 77.915,39.56 80.645,39.56 81.217,39.56 85.217,35.56 ; 85.217,35.56 P2.3 ; 85.217,35.56 P2.3 ; 85.217,35.56 P2.3
GPIO_PD13: P5.15 U2.60 | length 36.2
  Top Layer w0.254: U2.60 59.577,49.3 69.318,49.3 78.558,40.06 81.686,40.06 81.733,40.06 84.963,36.83 87.757,36.83 P5.15@88.964,38.036
GPIO_PD14: P2.2 U2.61 | length 32.8
  Top Layer w0.254: U2.61 59.577,49.8 70.088,49.8 79.328,40.56 81.686,40.56 82.376,40.56 84.836,38.1 P2.2
GPIO_PD15: P5.16 U2.62 | length 35.6
  Top Layer w0.254: U2.62 59.577,50.3 70.858,50.3 80.098,41.06 81.686,41.06 83.4,41.06 84.709,39.751 85.09,39.37 86.88,39.37 87.63,39.37 P5.16
GPIO_PE0: P4.16 U2.97 | length 67
  Top Layer w0.254: U2.97 46.3,59.577 46.3,62.179 46.3,64.664 v1(46.431,64.795) ; v1(57.912,88.316) 58.801,87.427 87.935,87.427 88.671,86.69 P4.16@88.671,85.839
  Bottom Layer w0.254: v1(46.431,64.795) 47.117,65.481 47.117,77.521 v1(57.912,88.316)
GPIO_PE1: U2.98 | length 7.6
  Top Layer w0.254: U2.98 45.8,59.577 45.8,62.179 45.8,65.688 v1(46.025,65.913)
GPIO_PE2: U2.1
GPIO_PE3: U2.2
GPIO_PE4: U2.3
GPIO_PE5: U2.4
GPIO_PE6: U2.5
GPIO_PE7: P2.13 U2.38 | length 58.6
  Top Layer w0.254: U2.38 50.8,42.023 50.8,30.099 50.8,27.147 56.563,21.384 62.453,15.494 75.184,15.494 80.518,10.16 86.272,10.135 P2.13@86.284,10.135
GPIO_PE8: P5.5 U2.39 | length 60.5
  Top Layer w0.254: U2.39 51.3,42.023 51.3,30.099 51.3,27.354 56.916,21.737 62.144,16.51 75.692,16.51 80.645,11.557 88.011,11.557 P5.5@89.027,12.573
GPIO_PE9: P2.12 U2.40 | length 56.4
  Top Layer w0.254: U2.40 51.8,42.023 51.8,30.099 51.8,27.561 57.27,22.091 61.962,17.399 75.946,17.399 80.645,12.7 P2.12
GPIO_PE10: P5.6 U2.41 | length 58.5
  Top Layer w0.254: U2.41 52.3,42.023 52.3,30.099 52.3,27.768 57.624,22.445 61.78,18.288 76.327,18.288 80.772,13.843 87.757,13.843 P5.6@89.027,15.113
GPIO_PE11: P2.11 U2.42 | length 54.1
  Top Layer w0.254: U2.42 52.8,42.023 52.8,30.099 52.8,27.975 57.977,22.798 61.725,19.05 76.581,19.05 79.756,15.875 85.725,15.875 P2.11
GPIO_PE12: P5.7 U2.43 | length 56.1
  Top Layer w0.254: U2.43 53.3,42.023 53.3,30.099 53.3,28.182 58.331,23.152 61.543,19.939 77.343,19.939 80.772,16.51 88.138,16.51 P5.7@89.154,17.526
GPIO_PE13: P2.10 U2.44 | length 51.8
  Top Layer w0.254: U2.44 53.8,42.023 53.8,30.099 53.8,28.389 58.684,23.505 61.361,20.828 78.105,20.828 81.153,17.78 P2.10
GPIO_PE14: P5.8 U2.45 | length 53.6
  Top Layer w0.254: U2.45 54.3,42.023 54.3,30.099 54.3,28.597 59.038,23.859 61.18,21.717 78.613,21.717 81.28,19.05 87.503,19.05 P5.8@88.837,20.383
GPIO_PE15: P2.9 U2.46 | length 49.5
  Top Layer w0.254: U2.46 54.8,42.023 54.8,30.099 54.8,28.804 59.391,24.212 61.252,22.352 79.375,22.352 81.407,20.32 P2.9
JRST: R9.1 SWJTAG.2 | length 10
  Top Layer w0.254: SWJTAG.2 35.814,80.797 37.668,82.652 R9.1
NetD1_1: D1.1 R4.1 | length 4.1
  Top Layer w0.254: R4.1 D1.1@12.512,74.168
NetR7_1: R7.1 U2.94 | length 22.1
  Top Layer w0.254: R7.1 45.822,75.692 46.99,75.692 47.8,74.882 U2.94
NRST: C21.2 R10.1 S1.2 U2.14 | length 113
  Top Layer w0.254: v1(19.888,39.268) 19.939,39.218 22.403,39.218 23.393,40.208 27.102,40.208 27.889,40.996 27.889,48.209 29.108,49.428 36.474,49.428 37.346,50.3 U2.14 ; v1(31.648,83.998) 35.255,83.998 ; S1.2 35.255,83.998 ; S1.2@33.843,86.233 R10.1 ; C21.2@36.273,83.82 C21.2 ; C21.2@36.273,83.998 35.255,83.998
  Bottom Layer w0.254: v1(19.888,39.268) 14.961,39.268 10.236,43.993 10.236,76.733 17.755,84.252 31.394,84.252 v1(31.648,83.998)
OSC32_IN: C2.1 R12.2 U2.8 Y2.2 | length 33.9
  Top Layer w0.254: C2.1@16.906,63.231 16.906,61.468 Y2.2 26.619,61.468 27.737,60.35 27.737,56.109 28.499,55.347 34.95,55.347 36.997,53.3 U2.8
OSC32_OUT: C4.2 R12.1 U2.9 Y2.1 | length 30.1
  Top Layer w0.254: R12.1@16.891,59.4 C4.2 21.846,57.631 23.089,56.388 Y2.1 26.746,54.534 34.722,54.534 36.456,52.8 U2.9
OSC_IN: C1.1 R11.2 U2.12 Y1.2 | length 29.3
  Top Layer w0.254: R11.2 16.967,48.489 ; C1.1 16.967,48.489 ; U2.12 36.162,51.3 35.56,50.698 26.822,50.698 Y1.2 17.247,48.768 16.967,48.489
OSC_OUT: C3.2 R11.1 U2.13 Y1.1 | length 33.4
  Top Layer w0.254: C3.2 Y1.1@24.585,43.381 ; C3.2@16.967,43.407 R11.1 ; Y1.1 26.518,43.688 27.178,44.348 27.178,48.87 28.346,50.038 36.22,50.038 36.982,50.8 U2.13
SWCLK: R6.2 SWJTAG.1 | length 4.5
  Top Layer w0.254: SWJTAG.1 42.801,78.74 R6.2
SWDIO: R5.2 SWJTAG.5 | length 7.9
  Top Layer w0.254: SWJTAG.5 35.814,74.879 36.195,74.498 40.21,74.498 R5.2
ULPI_RST: P1.8
VCAP1: C20.1 P5.10 U2.49 | length 52.4
  Top Layer w0.254: U2.49 56.3,29.425 60.452,25.273 82.931,25.273 84.074,24.13 87.884,24.13 P5.10@89.027,25.273 ; C20.1 80.594,25.375
VCAP2: C5.1 P4.5 U2.73 | length 35.8
  Top Layer w0.254: U2.73 78.109,55.8 ; C5.1 78.109,55.8 ; P4.5@88.994,58.514 87.775,59.733 82.042,59.733 78.109,55.8
VDD3.3: C6.1 C7.1 C8.1 C9.1 C10.2 C22.1 C23.1 C24.1 L1.1 R1.2 U2.6 U2.11 U2.19 U2.28 U2.50 U2.75 U2.100 | length 109.3
  Top Layer w0.254: C24.1 U2.19@43.197,47.803 ; C6.1 43.108,51.892 U2.11 ; v8@32.131,57.048 32.309,56.871 33.78,56.871 C10.2 37.26,57.05 40.01,54.3 U2.6 ; C8.1 44.78,58.42 U2.100 ; C7.1 45.187,34.341 45.8,34.954 U2.28 ; U2.50 57.379,42.621 57.379,32.131 C23.1 ; U2.75 65.512,56.8 67.716,59.004 68.631,59.004 68.758,59.131 69.139,59.131 C9.1
  Top Layer w0.5: v9@41.92,38.877 L1.1
  Top Layer w1.3: R1.2 26.265,70.737 32.131,64.872 v8@32.131,57.048
  Top Layer w1.5: C22.1 v8@32.004,56.921
  other v2: 45.06,33.706 57.379,35.357 32.106,47.777 32.741,51.918 67.234,58.471 44.806,68.097
  other v8: 32.055,56.871
  other v9: 41.935,38.862
VDDA: C11.1 C13.2 L1.2 R2.1 U2.22 | length 33
  Top Layer w0.254: R2.1 31.743,33.815 37.294,33.815 38.252,34.773 38.252,38.405 ; C11.1 38.252,38.405 ; C13.2@39.753,38.405 38.252,38.405 ; 40.691,45.847 41.144,46.3 U2.22
  Top Layer w0.5: C11.1 36.703,43.307 39.243,45.847 40.691,45.847 ; C13.2@40.02,38.672 L1.2
VREF+: C12.1 C14.2 R2.2 U2.21 VREF+.1 | length 27.4
  Top Layer w0.254: VREF+.1 R2.2@28.753,38.456 ; C12.1 28.804,38.405 R2.2@28.753,38.456 ; U2.21 37.097,46.8 R2.2@28.753,38.456
pads on no net: J1. J1.0 J1.2 J1.3 J1.4 P1.6 P3.15 P4.13 P6.10 P7.2

## Polygon pours and split planes (outlines as drawn)
3.3V on source "3.3v" (solid, remove dead copper, pour order 24): 0,100 92.5,100 92.5,0 0,0 -0.051,0.051 -0.051,3.759
+5V on source "+5v" (solid, remove dead copper, pour order 20): 0.4,99.46 0.457,100.076 92.431,100.203 77.089,100.203 76.962,100.076 76.86,99.974 76.86,79.934 76.86,78.054 76.505,77.699 76.784,77.419 76.784,77.241 25.984,77.241 25.806,77.419 23.571,79.654 23.571,85.42 19.279,85.42 18.364,86.335 16.688,88.011 13.081,88.011 13.081,88.29 9.373,91.999 9.288,91.914 8.509,91.923 2.174,91.923 2.174,79.654 3.962,77.241 3.962,55.575 6.68,54.966 6.68,46.076 3.962,46.076 3.962,34.315 3.962,16.027 40.869,16.027 40.869,0.4 0.457,0.457 0.4,92.964
VDD3.3 on source "VDD3.3" (solid, remove dead copper, pour order 18): 42.012,71.12 42.088,71.044 71.73,71.044 71.73,39.649 61.788,29.708 56.642,29.032 53.772,29.032 52.527,29.032 51.968,29.032 33.426,29.032 29.82,32.639 29.82,36.652 29.82,64.821 30.048,65.049
GND on Top Layer "GND" (hatched 90Degree grid 0.508 track 0.203, remove dead copper, pour order 30): 0,0 92.5,0 92.5,100 0,100
GND on Bottom Layer "GND" (hatched 90Degree grid 0.508 track 0.203, remove dead copper, pour order 32): 0,100 92.5,100 92.5,0 14.376,0 0,0
no net on splane (split plane): 152.29,0.91 0.91,0.91 0.91,101.49 152.29,101.49

## Keep-outs
Keep-Out Layer:
  lines w0.254: 0,0 92.5,0 92.5,100 0,100 0,25 0,0

## Other copper
Top Layer:
  rectangle net 3.3V: 7.595,82.906 10.922,89.306
  rectangle: 11.125,82.601 11.278,82.753

## Silkscreen, mask and mechanical layers (free items; w line width, h text height)
Top Overlay:
  text "D7" at 47.6,98.146 h1
  text "CLK" at 44.475,98.069 h1
  text "5v" at 60.223,97.942 h1
  text "GND" at 57.048,97.841 h1
  text "DAC" at 42.57,96.418 h1 r270
  text "D6" at 47.701,92.329 h1 r270
  text "GND" at 57.023,91.491 h1
  text "5v" at 60.452,91.44 h1
  text "PB9 PE0" at 79.629,86.538 h0.64
  text "NC PB8" at 79.68,83.363 h0.64
  text "PB6 PB7" at 79.781,81.077 h0.64
  text "CLK" at 37.617,80.188 h0.64
  text "RST" at 34.874,80.162 h0.64
  text "5v" at 32.614,80.112 h0.64
  text "PB5 NC" at 79.883,78.537 h0.64
  text "PB3  PB4" at 79.807,75.87 h0.64
  text "GND" at 37.668,74.168 h0.64
  text "DIO" at 35.179,74.143 h0.64
  text "3.3v" at 32.36,74.066 h0.64
  text "1" at 37.973,73.381 h0.64
  text "PD6  PD7" at 79.756,73.355 h0.64
  text "1" at 35.458,73.33 h0.64
  text "BOOT0" at 31.547,73.228 h0.64
  text "PD4  PD5" at 79.756,70.891 h0.64
  text "PD2 PD10" at 79.858,68.275 h0.64
  text "BOOT1" at 36.678,67.005 h0.64
  text "0" at 32.639,66.98 h0.64
  text "0" at 35.306,66.98 h0.64
  text "PD0 PD1" at 80.34,65.71 h0.64
  text "PC1 PC2" at 80.264,63.144 h0.64
  text "3.3V" at 1.575,60.985 h0.64
  text "PA14" at 79.451,60.579 h0.64
  text "PA15" at 82.194,60.579 h0.64
  text "3.3V" at 1.321,58.268 h0.64
  text "PA13" at 79.197,58.039 h0.64
  text "VCAP2" at 81.788,58.039 h0.64
  text "3.3V" at 1.575,55.804 h0.64
  text "PA11" at 79.553,55.677 h0.64
  text "PA12" at 81.864,55.677 h0.64
  text "5V" at 1.803,53.67 h0.64
  text "PA10" at 81.864,53.264 h0.64
  text "PA9" at 79.527,53.213 h0.64
  text "5V" at 1.803,50.8 h0.64
  text "PC9" at 79.553,50.673 h0.64
  text "PA8" at 81.864,50.597 h0.64
  text "5V" at 1.88,48.082 h0.64
  text "PC7 PC8" at 79.502,47.93 h0.64
  text "NC" at 1.956,45.796 h0.64
  text "GND" at 1.575,43.485 h0.64
  text "GND" at 1.727,40.767 h0.64
  text "PC6 PD15" at 79.604,40.361 h0.64
  text "GND" at 1.727,38.303 h0.64
  text "PD14 PD13" at 79.426,37.744 h0.64
  text "GND" at 1.727,35.281 h0.64
  text "PD12 PD11" at 79.4,35.128 h0.64
  text "GND" at 1.727,32.741 h0.64
  text "PD10 PD9" at 79.883,32.69 h0.64
  text "DAC_CK PB15" at 78.207,30.099 h0.64
  text "GND" at 1.651,30.048 h0.64
  text "GND" at 1.651,27.813 h0.64
  text "PB14 PB13" at 79.578,27.788 h0.64
  text "GND" at 1.651,25.654 h0.64
  text "PB12 VCAP1" at 78.918,24.917 h0.64
  text "GND" at 1.651,23.038 h0.64
  text "PB11 PB10" at 79.502,22.657 h0.64
  text "PE15 PE14" at 79.477,20.015 h0.64
  text "3.3v" at 56.896,17.729 h1 r270
  text "PE13 PE12" at 79.502,17.424 h0.64
  text "GND" at 54.153,16.916 h1 r270
  text "D0" at 33.934,16.688 h1 r270
  text "D7" at 51.613,15.977 h1 r270
  text "PE11 PE10" at 79.527,14.961 h0.64
  text "ULPI" at 30.328,13.132 h1 r270
  text "PE9 PE8" at 80.366,12.497 h0.64
  text "PE7 PB2" at 80.442,9.779 h0.64
  text "GND" at 54.204,8.56 h1 r270
  text "3.3v" at 56.896,8.56 h1 r270
  text "5v" at 32.791,8.509 h1 r270
  text "5v" at 36.601,8.382 h1 r270
  text "PB1 PB0" at 80.594,7.188 h0.64
  text "PC5" at 80.518,4.902 h0.64
  text "PC4" at 83.058,4.902 h0.64
  text "PA7" at 80.62,2.388 h0.64
  text "PA6" at 82.982,2.388 h0.64

## Text inside footprints (layer, text, board x,y; h text height)
P1: Bottom Overlay "20" at 58.844,10.668 h1.27 r180; Bottom Overlay "19" at 58.844,13.208 h1.27 r180; Bottom Overlay "1" at 31.92,13.208 h1.27 r180; Bottom Overlay "2" at 31.92,10.668 h1.27 r180
P7: Bottom Overlay "2" at 42.672,94.488 h1.27 r180; Bottom Overlay "1" at 42.672,97.028 h1.27 r180; Bottom Overlay "14" at 62.992,94.488 h1.27 r180; Bottom Overlay "13" at 62.992,97.028 h1.27 r180